# EAGLE board adapter_stick (EAGLE 7.2.0)
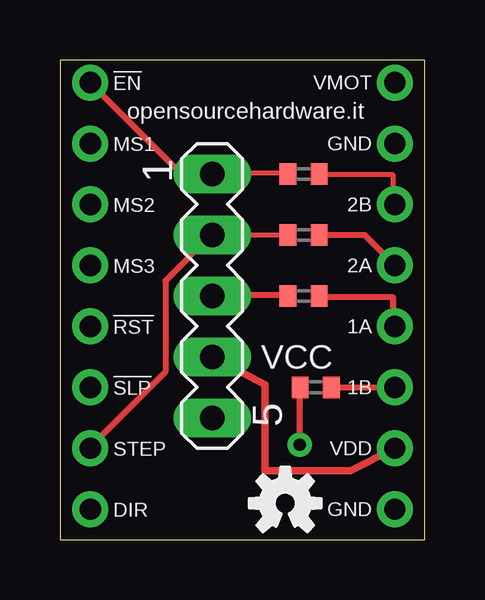
[diagram p0: board, top side]
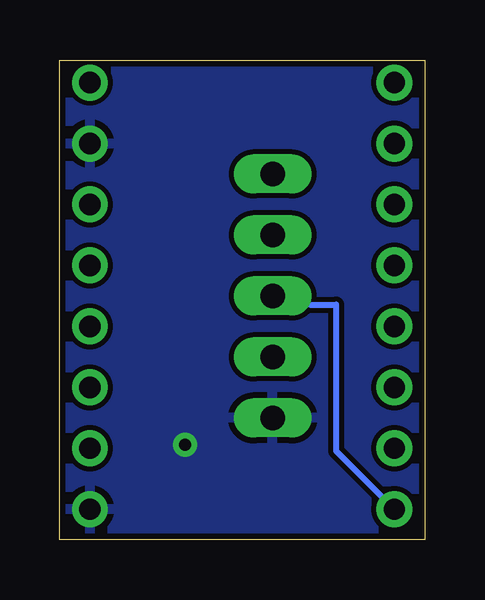
[diagram p1: board, bottom side, seen from below]

Size 15.22 x 19.99 mm. Coordinates in mm from the lower left corner, seen from the top.
Outline: 0,0 15.22,0 15.22,19.99 0,19.99 0,0
Copper layers (1*16): Top 0.035mm / dielectric 1.5mm / Bottom 0.035mm
Design rules "default": minimum track width 8mil, minimum drill 20mil, track to track 8mil, track to pad 8mil, pad to pad 8mil, via to via 8mil, smd to smd 8mil, copper to edge 10mil, drill to drill 8mil, minimum pad ring 12mil, minimum via ring 10mil, stop-mask expansion 4mil, vias tented up to drill 25mil, thermal gap 10mil

## Footprints (pad centres in the part's own frame; a part is rotated, then mirrored left to right if it is on the bottom)
CLONOLU = drill 0.889 pad 1.422: 1A 6.35,-1.27; 1B 6.35,-3.81; 2A 6.35,1.27; 2B 6.35,3.81; !EN -6.35,8.89; !RST -6.35,-1.27; !SLP -6.35,-3.81; DIR -6.35,-8.89; GND$1 6.35,6.35; GND$2 6.35,-8.89; MS1 -6.35,6.35; MS2 -6.35,3.81; MS3 -6.35,1.27; STEP -6.35,-6.35; VDD 6.35,-6.35; VMOT 6.35,8.89
R0402 = smd 0.7 x 0.9: 1 -0.65,0; 2 0.65,0
MA05-1 = drill 1.016 long: 1 -5.08,0; 2 -2.54,0; 3 0,0; 4 2.54,0; 5 5.08,0

## Placement (x,y rotation side)
J1X  CLONOLU  [CLONOLU]  7.62,10.16 0 top
R2  EN  [R0402]  10.16,15.24 0 top
R3  DIR  [R0402]  10.16,12.7 0 top
R4  STEP  [R0402]  10.16,10.16 0 top
R5  GND  [R0402]  10.67,6.35 0 top
SV1  [MA05-1]  6.35,10.16 270 top
U$1  [OSHW-LOGO-S]  9.4,1.52 0 top

## Library data of the parts
J1X = pololu-allegro
R2-R5 = rcl
SV1 = con-lstb; OC_FARNELL: unknown; OC_NEWARK: unknown
U$1 = SparkFun-Aesthetics

## Nets
2A: J1X.2A R3.2
DIR: J1X.DIR R4.1 SV1.3
EN: J1X.!EN R2.1 SV1.1
GND: J1X.GND$1 J1X.GND$2 R5.1 SV1.5
N$1: J1X.1B R5.2
N$2: J1X.1A R4.2
N$5: J1X.2B R2.2
NC: J1X.STEP R3.1 SV1.2
VDD: J1X.VDD SV1.4
VMOT: J1X.VMOT

## Tracks (layer width: path | path; a pad name or v marks a point on that pad's centre or on a via)
2A
  Top 0.254: R3.2 12.7,12.7 J1X.2A
DIR
  Top 0.203: 9.5,10.2 R4.1 | 6.4,10.2 SV1.3
  Top 0.254: 6.4,10.2 9.5,10.2
  Bottom 0.203: 4.8,9.8 5.1,10.1 6.3,10.1 SV1.3
  Bottom 0.254: J1X.DIR 3.7,3.7 3.7,9.8 4.8,9.8
EN
  Top 0.203: R2.1 9.5,15.3 6.4,15.3 SV1.1 6.3,15.3 5,15.3 | 1.3,19 J1X.!EN
  Top 0.254: 5,15.3 1.3,19
GND  (via drill 0.51)
  Top 0.254: v10,3.96 10,6.33 R5.1
  pour Bottom: 0,20.32 15.24,20.32 15.24,0 0,0
N$1
  Top 0.254: R5.2 J1X.1B
N$2
  Top 0.203: 10.9,10.1 R4.2 | 13.9,8.9 J1X.1A
  Top 0.254: 10.9,10.1 13.9,10.1 13.9,8.9
N$5
  Top 0.203: R2.2 10.9,15.2 13.9,15.2 13.9,14 J1X.2B
NC
  Top 0.203: R3.1 SV1.2 6.3,12.7 | 1.3,3.9 J1X.STEP
  Top 0.254: 1.3,3.9 4.4,7 4.4,10.8 6.3,12.7
VDD
  Top 0.203: 6.4,7.6 SV1.4
  Top 0.305: 6.4,7.6 8.55,6.46 8.55,2.88 12.12,2.88 J1X.VDD

## Text on the board
tNames: opensourcehardware.it | VCC